# Altium PCB MB1367.PcbDoc (part 3 of 6)
Units mm, origin at the board's own origin, x right, y up, seen from the top; angles counter-clockwise.
Board outline 70 x 82.5 mm, 4 copper layers (Top Layer, Signal Layer 1, Signal Layer 2, Bottom Layer), stack 1.614 mm thick; 192 components, 143 nets, 810 pads, 920 vias.
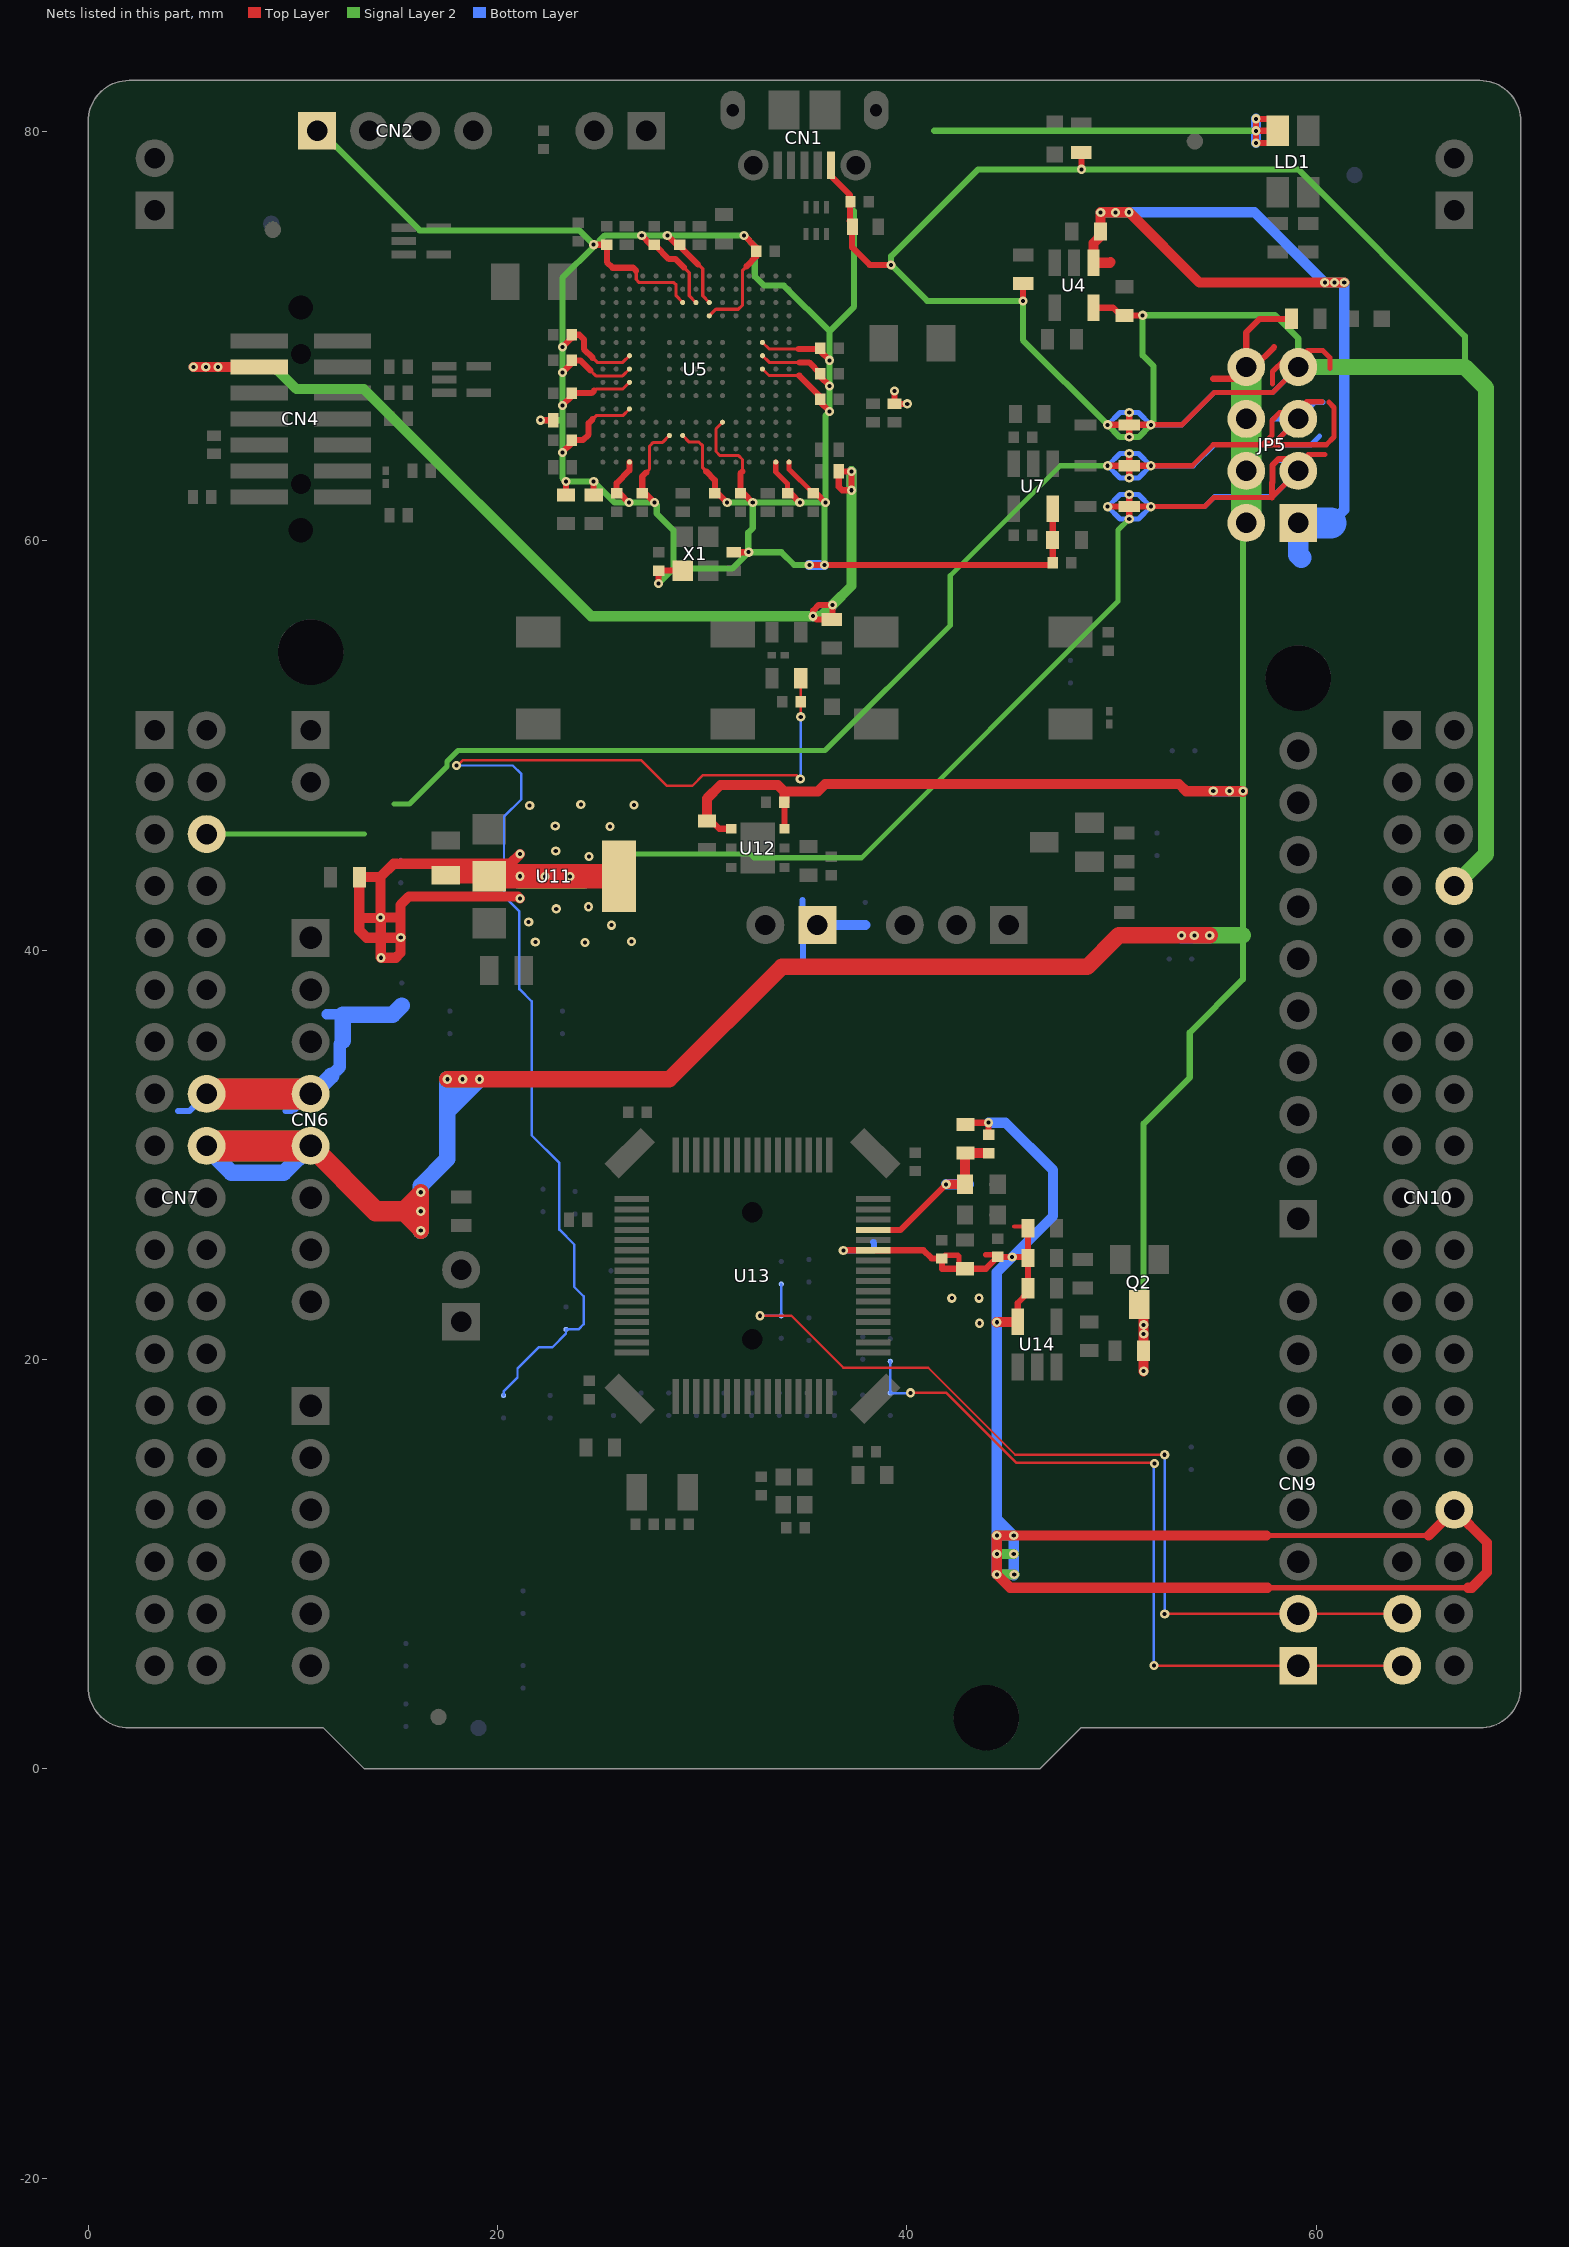
[diagram p4: the nets of this part, all layers, seen from the top]

## Via types
v1: diameter 0.45, hole 0.2, Top Layer to Bottom Layer, tented both sides, 920 vias

## Nets (pads, with @x,y where several pads share a name; then routed paths per layer and width w, separated by ;. In a path a pad name is that pad's centre, name@x,y a point inside that pad or via, vN(x,y) a via of type N, cw(c..) or ccw(c..) an arc to the next point about the centre after c; other vN are vias at no path point) (continued)
E5V: (continued)
  Top Layer w0.25: v1(51.925,63.675) 53.95,63.675 54.975,64.7 57.375,64.7 ; 57.825,64.875 57.935,64.765 ; 60.275,66.8 59.525,66.8 59.13,66.405 JP5.5@59.13,65.96 ; 60.625,66.775 60.875,66.525 60.875,65.075 60.5,64.7 58,64.7 57.935,64.765 ; 57.375,64.7 57.87,64.7 57.935,64.765 ; 57.375,64.7 57.84,65.165 57.84,65.89 58.225,66.275 58.815,66.275 JP5.5@59.13,65.96 ; 57.935,64.765 JP5.5@59.13,65.96
  Top Layer w0.3: v1(49.815,63.675) D2.1@50.87,63.675 ; v1(50.87,63.075) D2.1@50.87,63.675 ; v1(50.87,64.275) D2.1@50.87,63.675 ; v1(51.925,63.675) D2.1@50.87,63.675
  Signal Layer 2 w0.25: CN7.6@5.79,45.68 13.49,45.68 ; 14.955,47.145 15.701,47.145 17.531,48.975 17.531,49.222 18.069,49.76 36.01,49.76 42.125,55.875 42.125,58.3 47.5,63.675 v1(49.815,63.675)
  Bottom Layer w0.25: 57.9,65.95 57.91,65.96 JP5.5@59.13,65.96 ; 58.125,64.775 58.2,64.7 59.75,64.7 60.175,65.125 ; 60.325,66.775 59.945,66.775 JP5.5@59.13,65.96 ; v1(51.925,63.675) 51.325,63.075 v1(50.87,63.075) 50.415,63.075 v1(49.815,63.675) 50.415,64.275 v1(50.87,64.275) 51.325,64.275 v1(51.925,63.675) ; v1(51.925,63.675) 54,63.675 55.035,64.71 57.88,64.71 JP5.5@59.13,65.96